# Altium PCB Buck.PcbDoc
Units mil, origin at the board's own origin, x right, y up, seen from the top; angles counter-clockwise.
Board outline 965 x 1245 mil, 2 copper layers (Top Layer, Bottom Layer); 9 components, 6 nets, 22 pads, 3 vias.
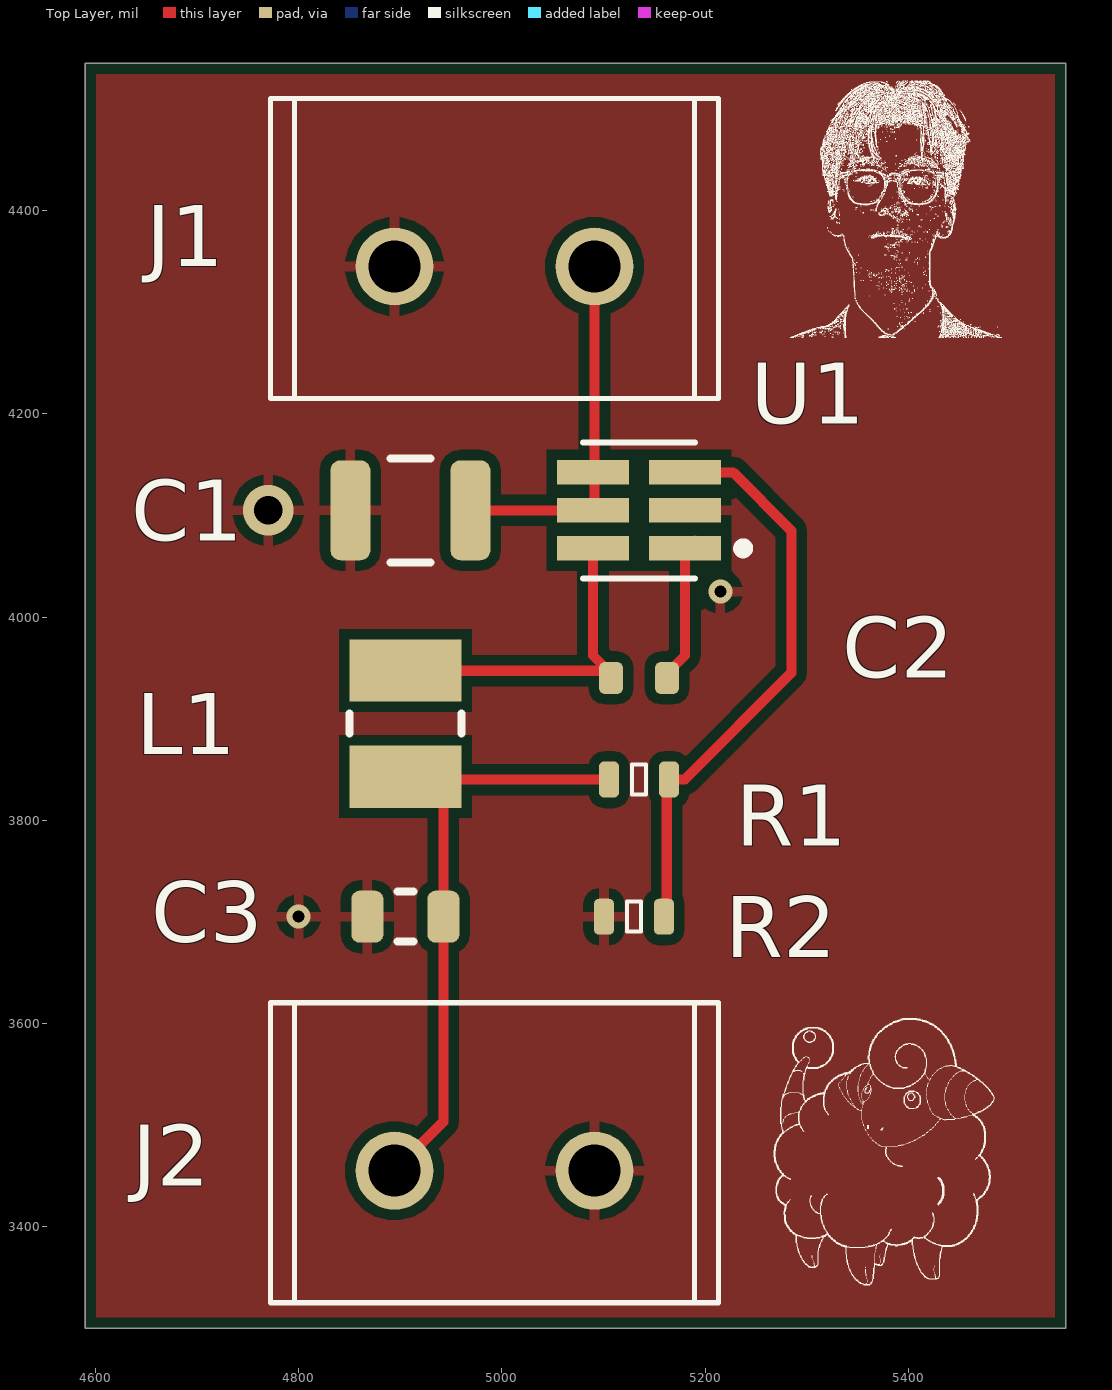
[diagram p0: Top Layer view]
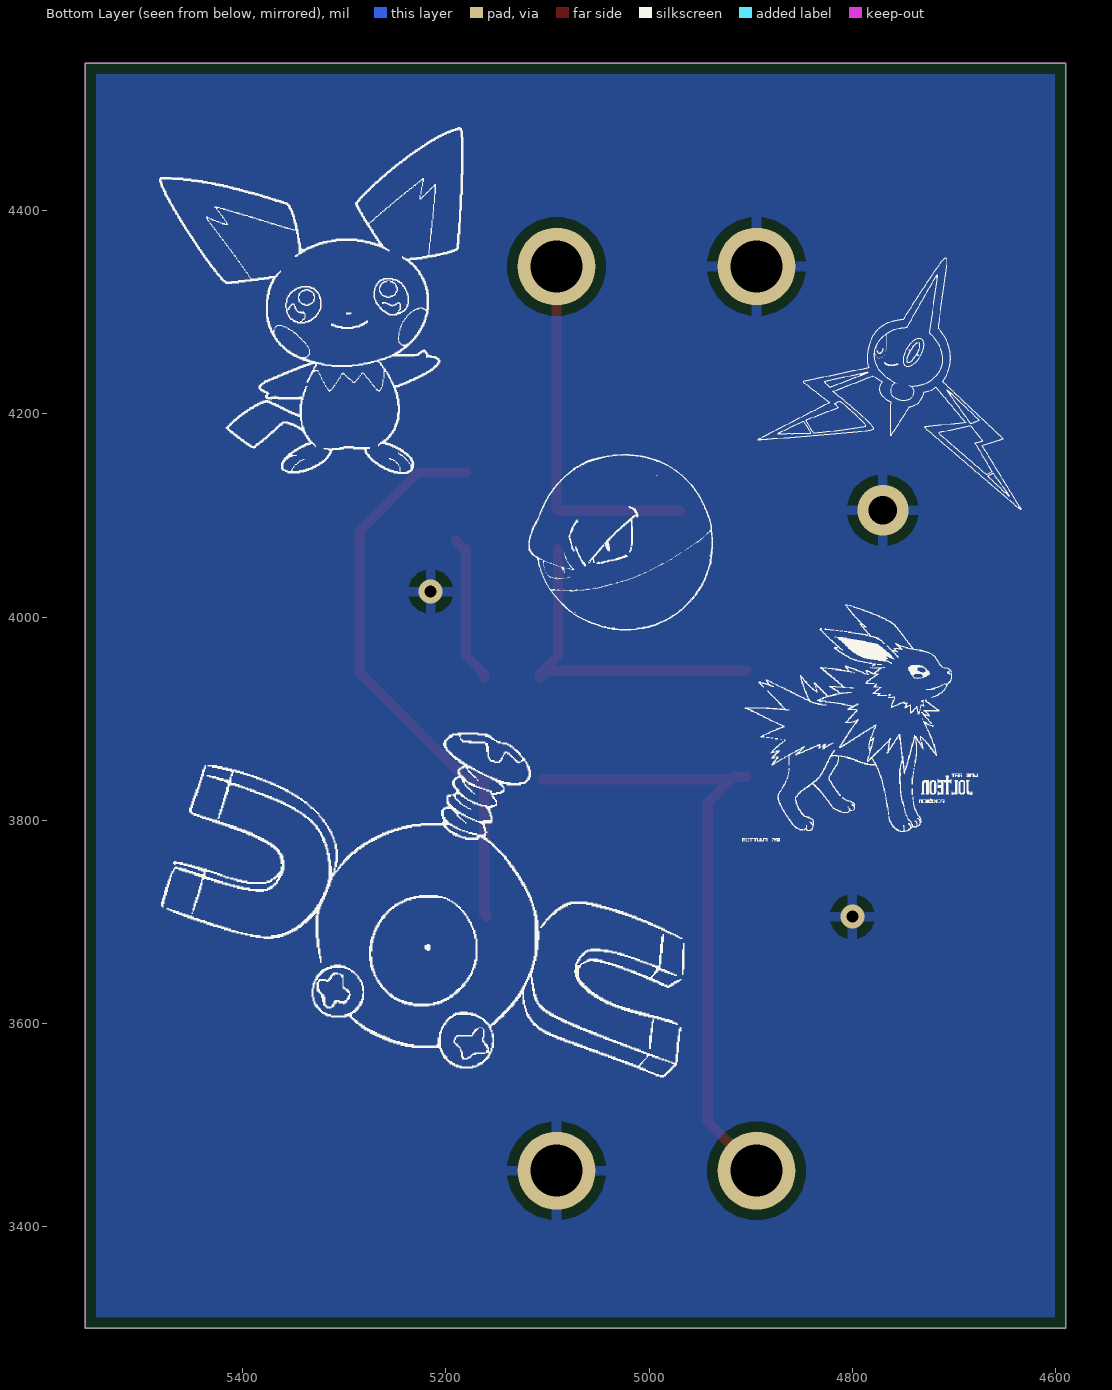
[diagram p1: Bottom Layer view, seen from below]
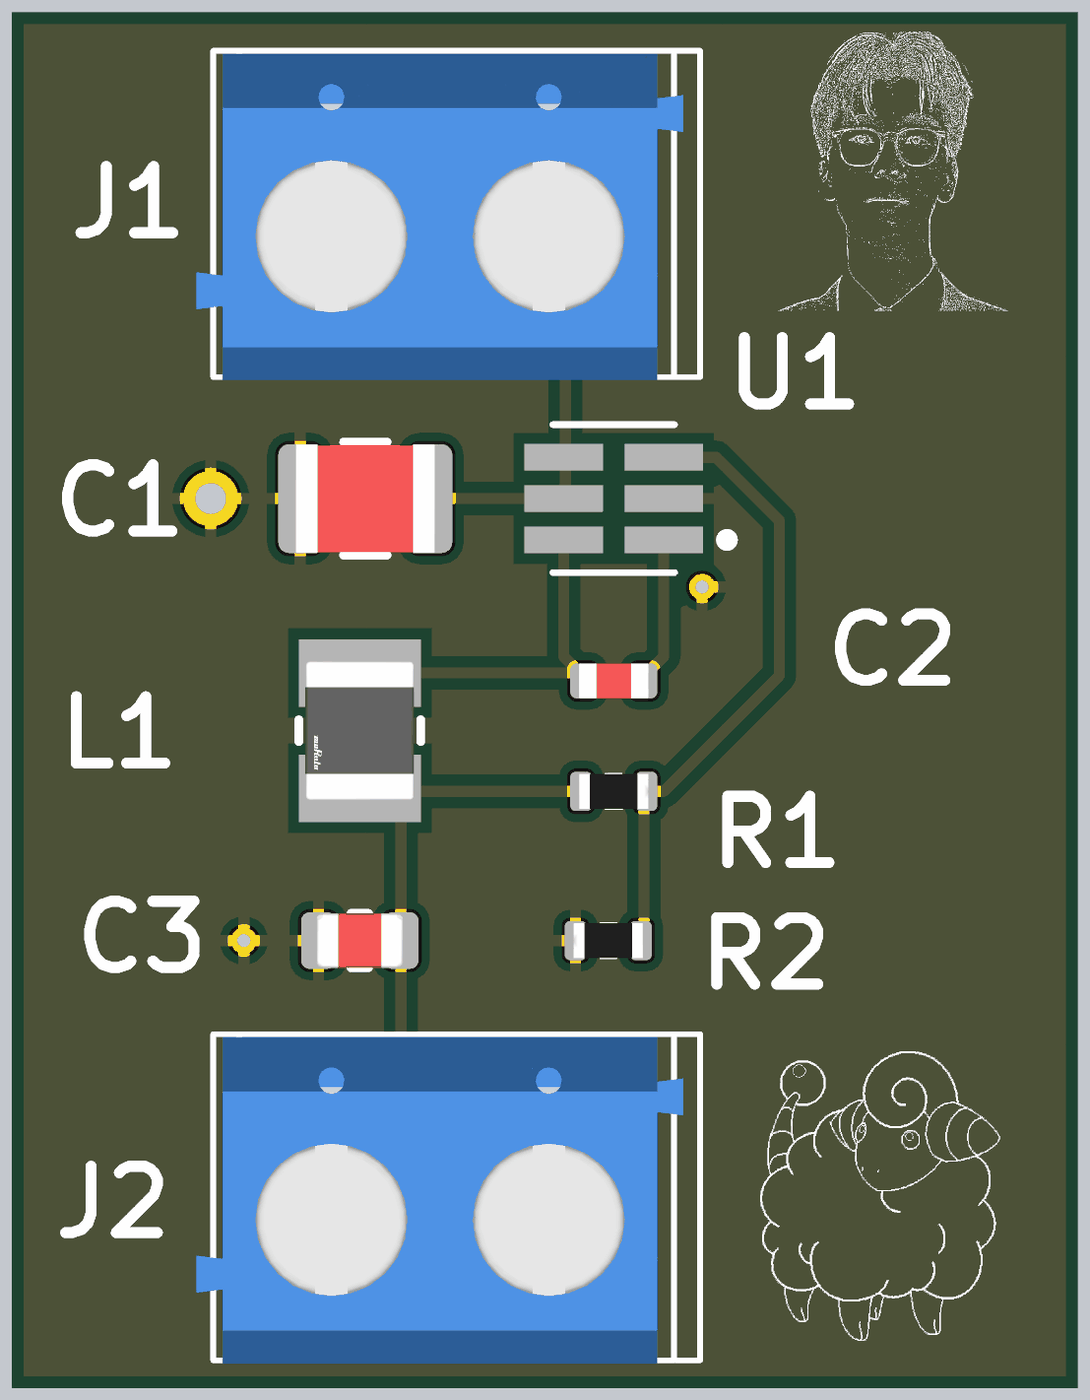
[diagram p2: 3D render of the assembled board from above, using the file's embedded part models]

## Layer stack, top to bottom
Top Solder: solder mask 0.4, Solder Resist, Dk 3.5
Top Layer: signal copper 1.4
Dielectric 1: dielectric 12.6, FR-4, Dk 4.8
Bottom Layer: signal copper 1.4
Bottom Solder: solder mask 0.4, Solder Resist, Dk 3.5

## Board outline
4590,3300 4590,4545 5555,4545 5555,3300

## Design rules (kind name [scope] priority, off if disabled: settings)
BoardOutlineClearance [All] p1: gap=7.87 ignorepadtopadclearanceinfootprint=FALSE
Clearance [All] p1: gap=5 ignorepadtopadclearanceinfootprint=FALSE except(9.84: Arc-Hole Track-Hole SMDPad-Hole THPad-Hole Via-Hole Fill-Hole Poly-Hole Region-Hole Text-Hole)
ComponentClearance [All] p1: gap=5 collisioncheckmode=3 verticalgap=5 showdistances=TRUE
DiffPairsRouting [All] p1: maxlimit=10 minlimit=5 mostfreqgap=5 toplayer_minwidth=5 toplayer_maxwidth=1000 toplayer_prefwidth=5 bottomlayer_minwidth=5 bottomlayer_maxwidth=1000 bottomlayer_prefwidth=5 maxuncoupledlength=500
Height [All] p1: minheight=0 maxheight=71497.94 prefheight=500
HoleSize [All] p1: absolutevalues=TRUE maxlimit=248.03 minlimit=11.81 maxpercent=80.000 minpercent=20.000
HoleToHoleClearance [All] p1: gap=9.84 allowstackedmicrovias=FALSE
MinimumAnnularRing [All] p1: minimumring=3
MinimumSolderMaskSliver [All] p1: minsoldermaskwidth=0
PlaneClearance [All] p1: clearance=5
PlaneConnect PlaneConnectPowerPads [InPadClass('PowerPads')] p1: planeconnectstyle=Direct reliefexpansion=20 reliefentries=4 reliefconductorwidth=10 reliefairgap=10
PlaneConnect [All] p2: pad.planeconnectstyle=Relief pad.reliefexpansion=11.81 pad.reliefentries=4 pad.reliefconductorwidth=5 pad.reliefairgap=5 via.planeconnectstyle=Direct via.reliefexpansion=11.81 via.reliefentries=4 via.reliefconductorwidth=5 via.reliefairgap=5
PolygonConnect PolygonConnectPowerPads [All vs (InPadClass('PowerPads'))] p1: connectstyle=Direct reliefconductorwidth=10 reliefentries=4 polygonreliefangle="90 Angle" airgapwidth=10
PolygonConnect [All] p2: thpad.connectstyle=Relief thpad.reliefconductorwidth=5 thpad.reliefentries=4 thpad.polygonreliefangle="90 Angle" thpad.airgapwidth=5 smdpad.connectstyle=Relief smdpad.reliefconductorwidth=5 smdpad.reliefentries=4 smdpad.polygonreliefangle="90 Angle" smdpad.airgapwidth=5 via.connectstyle=Direct via.reliefconductorwidth=5 via.reliefentries=4 via.polygonreliefangle="90 Angle" via.airgapwidth=5
RoutingVias [All] p1: holewidth=11.81 width=23.62 viastyle="Through Hole" minholewidth=11.81 minwidth=23.62 maxholewidth=23.62 maxwidth=259.84
SilkToSilkClearance [All] p1: silktosilkclearance=0
SilkToSolderMaskClearance [IsPad] p1: minsilkscreentomaskgap=5 clearancetoexposedcopper=TRUE
SolderMaskExpansion [All] p1: expansion=2.95 istentingtop=FALSE
Width [All] p1: maxlimit=1000 minlimit=5 preferedwidth=5 minimp=50.000000 maximp=50.000000 favimp=50.000000
20 further rules are at their usual default settings.

## Components (designator, comment, footprint, x,y, rotation, side; value= is the part's Value field where it differs from the comment)
C1 "CGA6M3X7R1H225M200AB" CAP1210R 4910,4105 r0 top value=2.2µF
C2 "LMK107BBJ106MAHT" CAP0603R 5135,3940 r0 top value=0.1µF
C3 "GCM21BR71A106KE22L" CAP0805R 4905,3705 r0 top value=10µF
J1 "691102710002" CON2_SCREW_5.00MM_691102710002 4992.73,4345 r0 top
J2 "691102710002" CON2_SCREW_5.00MM_691102710002 4992.73,3455 r0 top
L1 "DFE322520FD-3R3M=P2" FP-DFE322520F_D-IPC_B 4905,3895 r270 top
R1 "Resistor 51k +/-5% 0402 63 mW" RES0603R 5135,3840 r180 top value=51k
R2 "CRCW060322K1FKEA" RES0603R 5130,3705 r0 top value=22.1k
U1 "LMR50410YQDBVRQ1" DBV0006A-IPC_A 5135,4105 r180 top

## Footprints (in the part's own frame and the unit in brackets; to place one, negate y for a bottom-side part, rotate by r counter-clockwise, add the part's x,y. Pads: shape width x height; smd on the part's side, far side on the other; paste and mask are expansions set on the pad)
CAP0603R [mm] "capacitor 0603 reflow soldering"
  rrect50% 0.6x0.8 smd: 1(-0.7,0) 2(0.7,0)
  body extent -0.8,-0.4 0.8,0.4, height 0.3
CAP0805R [mm] "capacitor 0805 reflow soldering"
  rrect50% 0.8x1.3 smd: 1(-0.95,0) 2(0.95,0)
  silkscreen extent -0.2,-0.63 0.2,0.63, body extent -1,-0.62 1,0.63, height 0.78
CAP1210R [mm] "capacitor 1210 reflow soldering"
  rrect50% 1x2.5 smd: 1(-1.5,0) 2(1.5,0)
  silkscreen extent -0.5,-1.3 0.5,1.3, body extent -1.6,-1.25 1.6,1.25, height 0.92
CON2_SCREW_5.00MM_691102710002 [mm] "2-Pos Screw terminal 5mm pitch"
  round 1.95 hole 1.3: 1(-2.5,0) 2(2.5,0)
  silkscreen extent -5.6,-3.3 5.6,4.2, body extent -5.98,-3.37 5.22,4.13, height 10.03
DBV0006A-IPC_A [mm]
  rect 1.805x0.61 smd paste+0 mask+0: 1(-1.15,0.95) 2(-1.15,0) 3(-1.15,-0.95) 4(1.15,-0.95) 5(1.15,0) 6(1.15,0.95)
  silkscreen extent -2.73,-1.7 1.4,1.7
FP-DFE322520F_D-IPC_B [mil]
  rect 61.15x110.4 smd paste+0 mask+0: 1(-52.18,0) 2(52.18,0)
  silkscreen extent -10,-55 10,55, body extent -93,-65 93,65, height 10
RES0603R [mm] "resistor 0603 reflow soldering"
  rrect50% 0.5x0.9 smd: 1(-0.75,0) 2(0.75,0)
  silkscreen extent -0.18,-0.38 0.18,0.38, body extent -0.8,-0.4 0.8,0.4, height 0.45

## Part data
C1: library part CMP-024-000534-5, "CAP CER 2.2UF 50V X7R 1210", Case/Package="1210 (3225 Metric)", Manufacturer="TDK Corporation", Max Operating Temperature=125°C, Min Operating Temperature=-55°C, Ratings=AEC-Q200, Supplier Part Number 1=445-13028-1-ND, Temperature Coefficient=X7R, Tolerance=±20%, Voltage - Rated=50V, ComponentLink1Description=Datasheet, ComponentLink1URL=https://product.tdk.com/info/en/catalog/datasheets/mlcc_automotive_general_en.pdf?ref_disty=digikey, PN=CGA6M3X7R1H225M200AB, Supplier 1=Digi-Key
C2: library part CMP-024-001218-5, "CAP CER 10UF 10V X5R 0603", Case/Package="0603 (1608 Metric)", Manufacturer="Taiyo Yuden", Max Operating Temperature=85°C, Min Operating Temperature=-55°C, Ratings=AEC-Q200, Supplier Part Number 1=587-3412-2-ND, Temperature Coefficient=X5R, Tolerance=±20%, Voltage - Rated=10V, ComponentLink1Description=Datasheet, ComponentLink1URL=https://ds.yuden.co.jp/TYCOMPAS/ut/detail?pn=LMK107BBJ106MAHT%20%20&u=M, PN=LMK107BBJ106MAHT, Supplier 1=Digi-Key
C3: library part CMP-024-000714-5, "CAP CER 10UF 10V X7R 0805", Case/Package="0805 (2012 Metric)", Manufacturer="Murata Electronics", Max Operating Temperature=125°C, Min Operating Temperature=-55°C, Ratings=AEC-Q200, Supplier Part Number 1=490-10674-1-ND, Temperature Coefficient=X7R, Tolerance=±10%, Voltage - Rated=10V, ComponentLink1Description=Datasheet, ComponentLink1URL=https://search.murata.co.jp/Ceramy/image/img/A01X/G101/ENG/GCM21BR71A106KE22-01.pdf, PN=GCM21BR71A106KE22L, Supplier 1=Digi-Key
J1 J2: library part CMP-027-000000-1, "2 Position Wire to Board Terminal Block Horizontal with Board 0.197\" (5.00mm) Through Hole", Manufacturer="Würth Elektronik", Supplier Part Number 1=732-2028-ND, ComponentLink1Description=Datasheet, ComponentLink1URL=https://www.we-online.de/katalog/datasheet/6911027100xx.pdf, Connector Type="Screw Terminal", Contact Type=Wire, Number of Positions=2, Number of Rows=1, Pitch - Mating="0.197\" (5.00mm)", PN=691102710002, Series="WR-TBL Series 102", Supplier 1=Digi-Key
L1: library part CMP-006-00002-2, "FIXED IND 3.3UH 2.3A 65 MOHM SMD", ComponentLink1Description=Digi-Key, ComponentLink1URL=https://www.digikey.ca/en/products/detail/murata-electronics/DFE322520FD-3R3M-P2/10135197
R1: library part CMP-054-001030-4, "Chip Resistor, 51 KOhm, +/- 5%, 0.063 W, -55 to 155 degC, 0402 (1005 Metric)", Manufacturer="Vishay Dale", Max Operating Temperature=155°C, Min Operating Temperature=-55°C, Package="0603 (1608 Metric)", Power=63mW, Ratings=AEC-Q200, Supplier Part Number 1=541-22.1KHCT-ND, Tolerance=±1%, ComponentLink1Description=Datasheet, ComponentLink1URL=https://www.vishay.com/docs/20035/dcrcwe3.pdf, Composition="Thick Film", PN=CRCW060322K1FKEA, Supplier 1=Digi-Key
R2: library part CMP-054-001030-4, "RES SMD 22.1K OHM 1% 1/10W 0603", Manufacturer="Vishay Dale", Max Operating Temperature=155°C, Min Operating Temperature=-55°C, Package="0603 (1608 Metric)", Power="0.1W, 1/10W", Ratings=AEC-Q200, Supplier Part Number 1=541-22.1KHCT-ND, Tolerance=±1%, ComponentLink1Description=Datasheet, ComponentLink1URL=https://www.vishay.com/docs/20035/dcrcwe3.pdf, Composition="Thick Film", PN=CRCW060322K1FKEA, Supplier 1=Digi-Key
U1: "No Description Available", Mfr_Name="Texas Instruments", RefDes=RefDes, TYPE=TYPE

## Via types
v1: diameter 23.62, hole 11.81, Top Layer to Bottom Layer, 2 vias
v2: diameter 50, hole 28, Top Layer to Bottom Layer, 1 vias

## Nets (pads, with @x,y where several pads share a name; then routed paths per layer and width w, separated by ;. In a path a pad name is that pad's centre, name@x,y a point inside that pad or via, vN(x,y) a via of type N, cw(c..) or ccw(c..) an arc to the next point about the centre after c; other vN are vias at no path point)
GND: C1.1 C3.1 J1.1 J2.2 R2.1 U1.2
  other v1: 4800,3705 5215,4025
  other v2: 4770,4105
NetC1_2: C1.2 J1.2 U1.4 U1.5 | length 361.2
  Top Layer w10: C1.2 U1.5 5091.15,4106.45 J1.2
NetC2_1: C2.1 L1.1 U1.6 | length 340.2
  Top Layer w10: L1.1 5100.7,3947.18 C2.1@5107.44,3940.44 ; U1.6 5089.71,3962.16 5107.44,3944.43 C2.1@5107.44,3940.44 ; C2.1 C2.1@5107.44,3940.44
NetC2_2: C2.2 U1.1 | length 147.9
  Top Layer w10: C2.2 5162.56,3944.43 5180.29,3962.16 U1.1 5183,4067.6 5190,4074.6 U1.1@5190,4075
NetC3_2: C3.2 J2.1 L1.2 R1.2 | length 616
  Top Layer w10: J2.1 4942.4,3503.1 C3.2 4942.4,3817.24 L1.2@4919.64,3840 ; L1.2 4916.83,3842.82 L1.2@4919.64,3840 ; R1.2 L1.2@4919.64,3840
NetR1_1: R1.1 R2.2 U1.3 | length 569.5
  Top Layer w10: R2.2 5162.26,3707.74 5162.26,3837.74 R1.1 5180,3840 5285,3945 5285,4085 5227.6,4142.4 U1.3

## Polygon pours and split planes (outlines as drawn)
GND on Top Layer "GND_L01_P000" (solid, pour order 0): 4575,4550 5555,4550 5555,3285 4580,3285
GND on Bottom Layer "GND_L02_P001" (solid, pour order 1): 4590,3300 4590,4545 5555,4545 5555,3300

## Keep-outs
Keep-Out Layer:
  lines w1: 4590,3300 5555,3300 ; 4590,3300 4590,4545 ; 4590,3300 5555,3300 ; 4590,3300 4590,4545 ; 4590,4545 5555,4545 ; 4590,4545 5555,4545 ; 5555,3300 5555,4545 ; 5555,3300 5555,4545

## Silkscreen, mask and mechanical layers (free items; w line width, h text height)
Top Overlay:
  drawing of 3203 lines, arcs and shapes, not listed
Bottom Overlay:
  drawing of 990 lines, arcs and shapes, not listed
Board Outline:
  the board outline again, w10

## Text inside footprints (layer, text, board x,y; h text height)
J1: Mechanical 4 "1" at 4849.02,4240.67 h73.82; Mechanical 4 "1" at 4849.02,4240.67 h73.82
J2: Mechanical 4 "1" at 4849.02,3350.67 h73.82; Mechanical 4 "1" at 4849.02,3350.67 h73.82